# EAGLE board EncoderPCB_V1_1 (EAGLE 9.5.2)
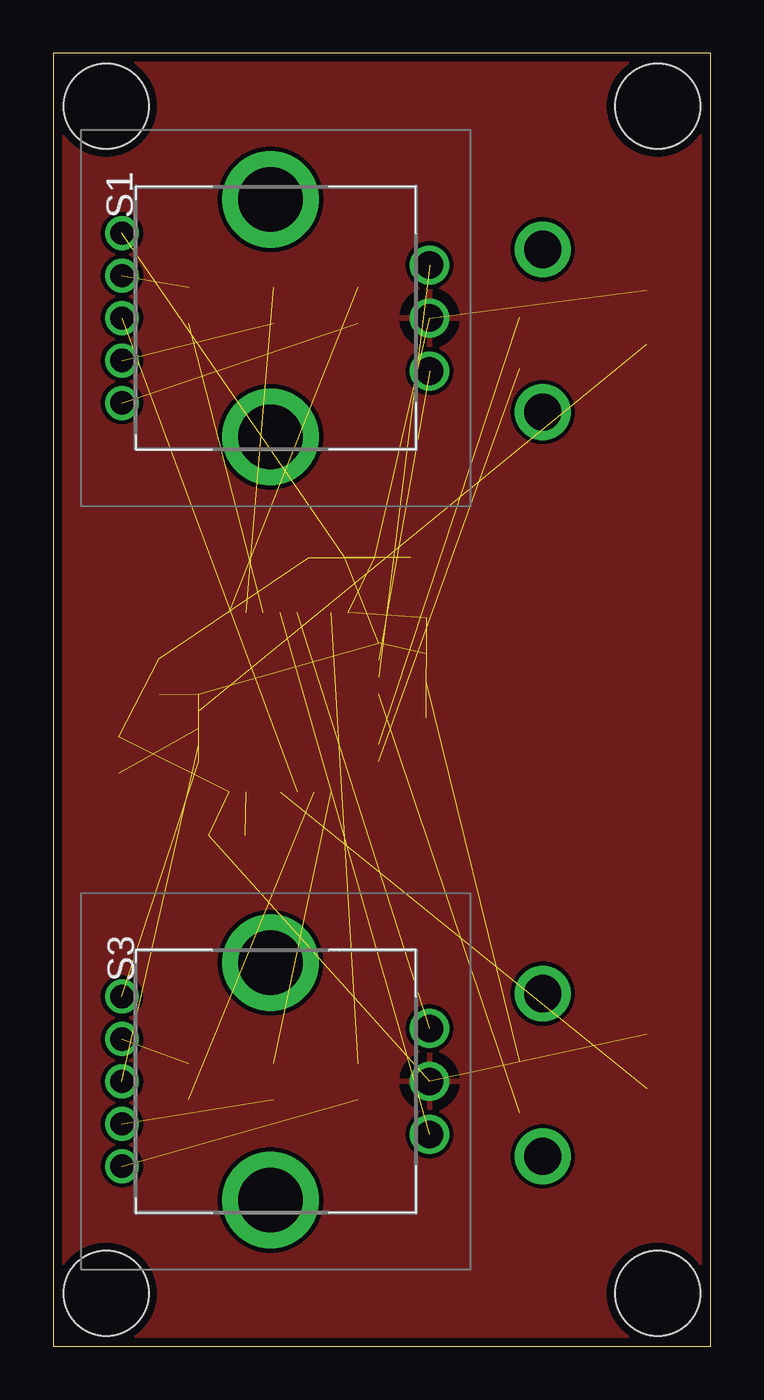
[diagram p0: board, top side]
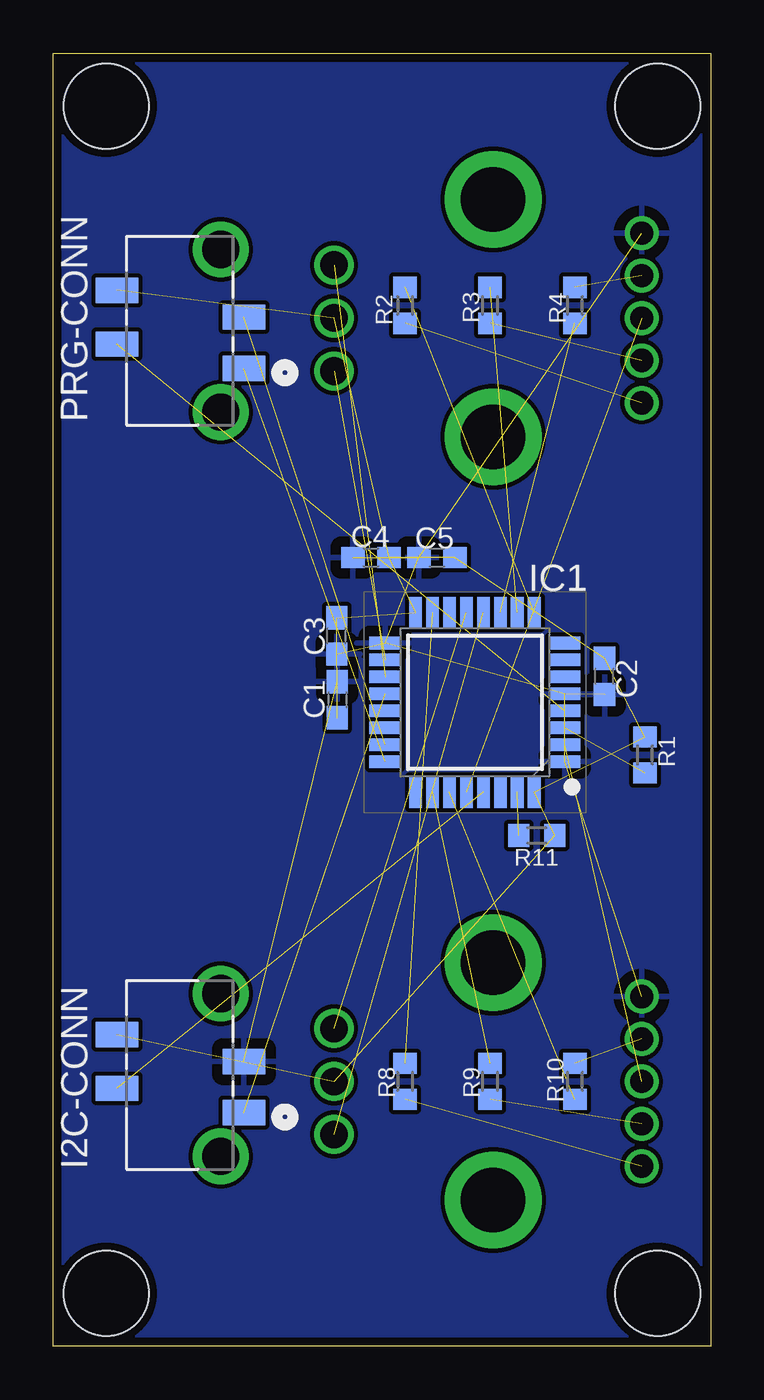
[diagram p1: board, bottom side, seen from below]

Size 31 x 61 mm. Coordinates in mm from the lower left corner, seen from the top.
Outline: 0,0 31,0 31,61 0,61 0,0
Copper layers (1*16): Top 0.035mm / dielectric 1.5mm / Bottom 0.035mm
Design rules "aisler_go_2layer *": minimum track width 0.1mm, minimum drill 0.2mm, track to track 0.2mm, track to pad 0.2mm, pad to pad 0.2mm, via to via 0.2mm, smd to smd 0.2mm, copper to edge 0.4mm, drill to drill 0.21mm, minimum pad ring 0.25mm, minimum via ring 0.05mm, stop-mask expansion 0.01mm, vias tented up to drill 0mil, thermal gap 20mil
Holes 4 mm at 2.5,58.5 28.5,2.5 2.5,2.5 28.5,58.5

## Footprints (pad centres in the part's own frame; a part is rotated, then mirrored left to right if it is on the bottom)
C0603 = smd 1.1 x 1: 1 -0.85,0; 2 0.85,0
MOLEX_90814-0204 = smd 1.194 x 2.007: 1 0.127,0; 2 1.27,5.994; 3 2.54,0; 4 3.81,5.994 | drill 1.753 pad 2.629: 5 -1.93,1.092; 6 5.74,1.092
QFP80P900X900X160-32N = smd 1.475 x 0.6: 1 -4.238,2.8; 2 -4.238,2; 3 -4.238,1.2; 4 -4.238,0.4; 5 -4.238,-0.4; 6 -4.238,-1.2; 7 -4.238,-2; 8 -4.238,-2.8; 17 4.238,-2.8; 18 4.238,-2; 19 4.238,-1.2; 20 4.238,-0.4; 21 4.238,0.4; 22 4.238,1.2; 23 4.238,2; 24 4.238,2.8 | smd 0.6 x 1.475: 9 -2.8,-4.238; 10 -2,-4.238; 11 -1.2,-4.238; 12 -0.4,-4.238; 13 0.4,-4.238; 14 1.2,-4.238; 15 2,-4.238; 16 2.8,-4.238; 25 2.8,4.238; 26 2,4.238; 27 1.2,4.238; 28 0.4,4.238; 29 -0.4,4.238; 30 -1.2,4.238; 31 -2,4.238; 32 -2.8,4.238
R0603 = smd 1 x 1.1: 1 -0.85,0; 2 0.85,0
PEL12T4225SS1024 = drill 1.1 pad 1.6: 1 -4,7.25; 2 -2,7.25; 3 0,7.25; 4 2,7.25; 5 4,7.25 | drill 1.3 pad 1.85: A1 -2.5,-7.25; B1 2.5,-7.25; C1 0,-7.25 | drill 3.041 pad 4.562: MH1 -5.6,0.25; MH2 5.6,0.25

## Placement (x,y rotation side)
C1  100nF  [C0603]  17.6,30.5 270 bottom
C2  100nF  [C0603]  5,31.6 90 bottom
C3  100nF  [C0603]  17.63,33.51 90 bottom
C4  100nF  [C0603]  16.01,37.21 0 bottom
C5  [C0603]  12.9,37.2 0 bottom
I2C-CONN  90814-0204  [MOLEX_90814-0204]  22,10.9 90 bottom
IC1  STM32F031K6T6  [QFP80P900X900X160-32N]  11.11,30.38 180 bottom
PRG-CONN  90814-0204  [MOLEX_90814-0204]  22,46 90 bottom
R1  10k  [R0603]  3.1,27.9 270 bottom
R2  51 R  [R0603]  14.4,49.1 270 bottom
R3  51 R  [R0603]  10.4,49.1 270 bottom
R4  51 R  [R0603]  6.4,49.1 90 bottom
R8  51 R  [R0603]  14.4,12.5 270 bottom
R9  51 R  [R0603]  10.4,12.5 270 bottom
R10  51 R  [R0603]  6.4,12.5 90 bottom
R11  10k  [R0603]  8.2,24.1 180 bottom
S1  PEL12T-4225S-S1024  [PEL12T4225SS1024]  10.5,48.5 90 top
S3  PEL12T-4225S-S1024  [PEL12T4225SS1024]  10.5,12.5 90 top

## Library data of the parts
C1-C4 = C_Sager_Bibliothek
C5 R1-R4 R8-R11 = passive components
I2C-CONN PRG-CONN = electro_mechanical; DESCRIPTION: CONN HEADER 4POS 1.27MM SMD TIN; HEIGHT: mm; MANUFACTURER_NAME: Molex; MANUFACTURER_PART_NUMBER: 90814-0204; MOUSER_PART_NUMBER: 538-90814-0204; MOUSER_PRICE-STOCK: https://www.mouser.com/Search/Refine.aspx?Keyword=538-90814-0204
IC1 = C_Sager_Bibliothek; DESCRIPTION: ARM Microcontrollers - MCU 16/32-BITS MICROS; HEIGHT: 1.6mm; MANUFACTURER_NAME: STMicroelectronics; MANUFACTURER_PART_NUMBER: STM32F031K6T6; MOUSER_PART_NUMBER: 511-STM32F031K6T6; MOUSER_PRICE-STOCK: https://www.mouser.com/Search/Refine.aspx?Keyword=511-STM32F031K6T6
S1 S3 = C_Sager_Bibliothek; DESCRIPTION: Encoders Red Blue/Green LED Push Switch Knurled; HEIGHT: 25mm; MANUFACTURER_NAME: Bourns; MANUFACTURER_PART_NUMBER: PEL12T-4225S-S1024; MOUSER_PART_NUMBER: 652-PEL12T4225SS1024; MOUSER_PRICE-STOCK: https://www.mouser.com/Search/Refine.aspx?Keyword=652-PEL12T4225SS1024

## Nets
+3V3: C1.1 C2.1 C3.1 C4.1 C5.1 I2C-CONN.3 IC1.1 IC1.5 IC1.17 S1.5 S3.5
ADRR.: IC1.3 R1.2
B_ENC1: IC1.11 R4.1
B_ENC2: IC1.14
B_ENC3: IC1.27 R10.1
BOOT_0: IC1.31 R11.2
BUTTON_ENC1: IC1.28 S1.3
BUTTON_ENC2: IC1.30
BUTTON_ENC3: IC1.2 S3.3
ENCODER1_A: IC1.18 S1.A1
ENCODER1_B: IC1.19 S1.B1
ENCODER2_A: IC1.6
ENCODER2_B: IC1.7
ENCODER3_A: IC1.12 S3.A1
ENCODER3_B: IC1.13 S3.B1
G_ENC1: IC1.10 R3.1
G_ENC2: IC1.22
G_ENC3: IC1.26 R9.1
GND: C1.2 C2.2 C3.2 C4.2 C5.2 I2C-CONN.4 IC1.16 IC1.32 PRG-CONN.4 R1.1 R11.1 S1.C1 S3.C1
I2C1_SCL: I2C-CONN.2 IC1.29
I2C1_SDA: I2C-CONN.1 IC1.20
N$9: R2.2 S1.1
N$10: R3.2 S1.2
N$12: R4.2 S1.4
N$15: R8.2 S3.1
N$16: R9.2 S3.2
N$17: R10.2 S3.4
NRST: IC1.4 PRG-CONN.2
R_ENC1: IC1.9 R2.1
R_ENC2: IC1.21
R_ENC3: IC1.15 R8.1
SWCLK: IC1.24 PRG-CONN.1
SWDIO: IC1.23 PRG-CONN.3
USART1_RX1: IC1.25
USART1_TX: IC1.8

## Tracks (layer width: path | path; a pad name or v marks a point on that pad's centre or on a via)
+3V3  (10 unrouted)
  pour Bottom: 32.5,62.5 32.5,-1.5 -1.5,-1.5 -1.5,62.5
ADRR.  (1 unrouted)
B_ENC1  (1 unrouted)
B_ENC3  (1 unrouted)
BOOT_0  (1 unrouted)
BUTTON_ENC1  (1 unrouted)
BUTTON_ENC3  (1 unrouted)
ENCODER1_A  (1 unrouted)
ENCODER1_B  (1 unrouted)
ENCODER3_A  (1 unrouted)
ENCODER3_B  (1 unrouted)
G_ENC1  (1 unrouted)
G_ENC3  (1 unrouted)
GND  (12 unrouted)
  pour Top: 31.5,61.5 31.5,-0.5 -0.5,-0.5 -0.5,61.5
I2C1_SCL  (1 unrouted)
I2C1_SDA  (1 unrouted)
N$9  (1 unrouted)
N$10  (1 unrouted)
N$12  (1 unrouted)
N$15  (1 unrouted)
N$16  (1 unrouted)
N$17  (1 unrouted)
NRST  (1 unrouted)
R_ENC1  (1 unrouted)
R_ENC3  (1 unrouted)
SWCLK  (1 unrouted)
SWDIO  (1 unrouted)